# Altium PCB SM1_System-exp.PcbDoc
Units mil, origin at the board's own origin, x right, y up, seen from the top; angles counter-clockwise.
Board outline 6000 x 4000 mil, 2 copper layers (Top Layer, Bottom Layer); 47 components, 45 nets, 224 pads, 0 vias.
Unrouted connection lines stored in the file: 112.
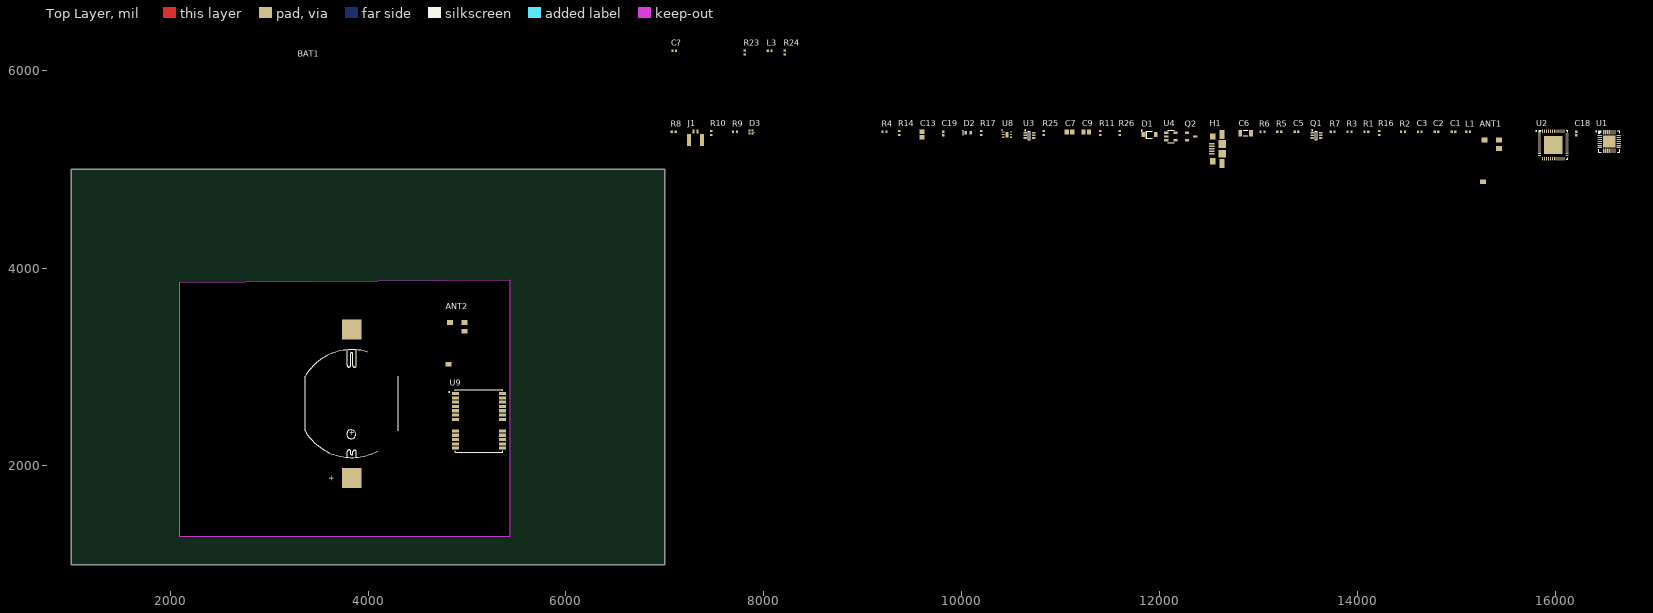
[diagram p0: Top Layer view]
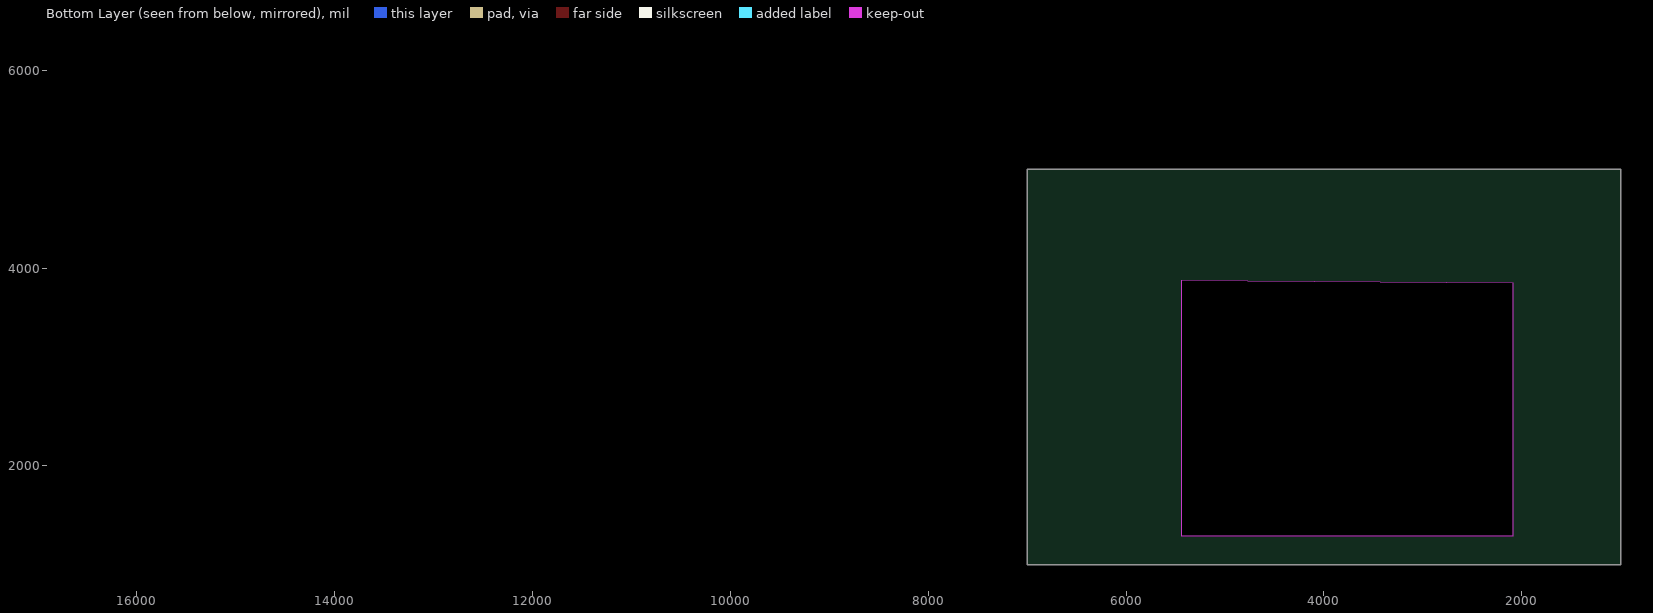
[diagram p1: Bottom Layer view, seen from below]

## Layer stack, top to bottom
Top Solder: solder mask 0.4, Solder Resist, Dk 3.5
Top Layer: signal copper 1.4
Dielectric 1: dielectric 12.6, FR-4, Dk 4.8
Bottom Layer: signal copper 1.4
Bottom Solder: solder mask 0.4, Solder Resist, Dk 3.5

## Board outline
1000,1000 7000,1000 7000,5000 1000,5000
cut-out: 2092.5,3850 2092.5,1290 5437.5,1290 5437.5,1505 5437.5,3875

## Design rules (kind name [scope] priority, off if disabled: settings)
Clearance [All] p1: gap=10 ignorepadtopadclearanceinfootprint=FALSE except(0: Arc-Hole Track-Hole SMDPad-Hole THPad-Hole Via-Hole Fill-Hole Poly-Hole Region-Hole Text-Hole)
PolygonConnect [All] p1: connectstyle=Relief reliefconductorwidth=10 reliefentries=4 polygonreliefangle="90 Angle" airgapwidth=10
RoutingVias [All] p1: holewidth=28 width=50 viastyle="Through Hole" minholewidth=28 minwidth=50 maxholewidth=28 maxwidth=50
SolderMaskExpansion [All] p1: expansion=4 istentingtop=FALSE
Width [All] p1: maxlimit=10 minlimit=10 preferedwidth=10
30 further rules are at their usual default settings.

## Classes and differential pairs
component class SM2_GPS_Module: ANT2 C? D4 L3 R23 R24 U9 U10
component class SM1_System: ANT1 BAT1 C1 C2 C3 C5 C6 C7 C9 C13 C18 C19 D1 D2 D3 H1 J1 L1 Q1 Q2 Q5 Q? R1 R2 R3 R4 R5 R6 R7 R8 R9 R10 R11 R14 R16 R17 R25 R26 U1 U2 U3 U4 U5 U8

## Components (designator, comment, footprint, x,y, rotation, side; value= is the part's Value field where it differs from the comment)
ANT1 "RF ANT 2.4GHZ STAMPED MET SLD" PRO-OB-440 15430,5295 r0 top
ANT2 "RF ANT 2.4GHZ STAMPED MET SLD" PRO-OB-440 4975,3450 r0 top
BAT1 "BATTERY-HOLDER (2450)" BU2450SM-JJ-GTR 3835,2630 r90 top value="Coin Cell Holder"
C1 "" CAPC1005X56N 14970,5380 r0 top
C2 "" CAPC1005X56N 14800,5380 r0 top
C3 "4.7uF" CAPC1005X56N 14630,5380 r0 top
C5 "0.1uF" CAPC1005X56N 13385,5380 r0 top
C6 "100uF" CAPC3216X160L 12870,5365 r0 top
C7 "10uF" CAPC2012X140N 11090,5375 r0 top
C9 "10uF" CAPC2012X140N 11260,5375 r0 top
C13 "10uF" CAPC2012X140N 9600,5350 r90 top
C18 "1uF" CAPC1005X56N 16210,5360 r90 top
C19 "0.1uF" CAPC1005X56N 9815,5360 r90 top
C? "0.1uF" CAPC1005X56N 7095,6195 r0 top
D1 "MBR0520" SOD123 11900,5350 r0 top
D2 "LED_0603" LED1608X55N-RED 10065,5370 r0 top value=Red
D3 "RGB" FC-B1010RGBT-HG 7870,5375 r0 top value="RGB Led"
H1 "Micro USB" 1981584-1 12580,5205 r90 top
J1 "CON2" JST_Micro_2PIN 7310,5380 r0 top
L1 "Inductor" RESC1005X40L 15120,5380 r0 top value=1.8nH
L3 "Inductor" RESC1005X40L 8060,6195 r0 top value=27uH
Q1 "BC847S" SOT65P210X110-6N 13585,5340 r0 top value=2NPN
Q2 "FDN340P" SOT95P240X110-3N 12320,5330 r0 top value="Mosfet P-H"
R1 "10K" RESC1005X40L 14090,5380 r0 top
R2 "22.1K" RESC1005X40L 14460,5380 r0 top
R3 "10K" RESC1005X40L 13920,5380 r0 top
R4 "43K" RESC1005X40L 9220,5380 r0 top
R5 "4.7K" RESC1005X40L 13210,5380 r0 top
R6 "10K" RESC1005X40L 13040,5380 r0 top
R7 "10K" RESC1005X40L 13750,5380 r0 top
R8 "1K" RESC1005X40L 7090,5380 r0 top
R9 "1K" RESC1005X40L 7710,5380 r0 top
R10 "1K" RESC1005X40L 7470,5365 r90 top
R11 "100K" RESC1005X40L 11400,5365 r90 top
R14 "2K" RESC1005X40L 9370,5365 r90 top
R16 "47.5K" RESC1005X40L 14220,5365 r90 top
R17 "100R" RESC1005X40L 10200,5365 r90 top
R23 "22R" RESC1005X40L 7810,6180 r90 top
R24 "1K" RESC1005X40L 8210,6180 r90 top
R25 "2.2K" RESC1005X40L 10830,5365 r90 top
R26 "470" RESC1005X40L 11600,5365 r90 top
U1 "CP2102N" 28-QFN 16545,5280 r0 top
U2 "ESP32-PICO-D4" QFN48 15980,5245 r0 top
U3 "PESD5V0L5UY" SOT65P210X110-6N 10685,5340 r0 top value=ESD
U4 "" SOT95P280X144-5N 12115,5330 r0 top value="LDO 3.3V"
U8 "XB6566H0" "DFN-6 2x2mm" 10460,5350 r0 top value="Battery Protection"
U9 "NEO-6M-GPS" XCVR_NEO-6M-GPS 5121.22,2456.02 r0 top

## Footprints (in the part's own frame and the unit in brackets; to place one, negate y for a bottom-side part, rotate by r counter-clockwise, add the part's x,y. Pads: shape width x height; smd on the part's side, far side on the other; paste and mask are expansions set on the pad)
28-QFN [mm] "QFN, 28-Leads, Body 5.00x5.00mm, Pitch 0.50mm, Thermal Pad 3.15x3.15mm, IPC Medium Density"
  oval 1.15x0.3 smd: 1(-2.4,1.5) 2(-2.4,1) 3(-2.4,0.5) 4(-2.4,0) 5(-2.4,-0.5) 6(-2.4,-1) 7(-2.4,-1.5) 15(2.4,-1.5) 16(2.4,-1) 17(2.4,-0.5) 18(2.4,0) 19(2.4,0.5) 20(2.4,1) 21(2.4,1.5)
  oval 0.3x1.15 smd: 8(-1.5,-2.4) 9(-1,-2.4) 10(-0.5,-2.4) 11(0,-2.4) 12(0.5,-2.4) 13(1,-2.4) 14(1.5,-2.4) 22(1.5,2.4) 23(1,2.4) 24(0.5,2.4) 25(0,2.4) 26(-0.5,2.4) 27(-1,2.4) 28(-1.5,2.4)
  rect 3.15x3.15 smd paste-0.635: 29(0,0)
  silkscreen extent -3.39,-2.73 2.73,2.73, body extent -2.58,-2.57 2.57,2.58, height 1
1981584-1 [mm] "CONN RCPT MICRO USB TYPE AB"
  rect 0.4x1.35 smd: 1(-1.3,1.338) 2(-0.65,1.338) 3(0,1.338) 4(0.65,1.338) 5(1.3,1.338)
  rect 2.3x1.3 smd: 6(-3.75,-1.337) 6(3.75,-1.337)
  rect 1.6x1.4 smd: 6(-3.2,1.113) 6(3.2,1.113)
  rect 2x1.9 smd: 6(-1.25,-1.337) 6(1.25,-1.337)
  body extent -4.4,-4.05 4.4,1.55, height 2.75
BU2450SM-JJ-GTR [mil] "HOLDER,BATT,COIN,24.5MM,SMT"
  rect 200x200 smd: 1(-750,0) 2(750,0)
  silkscreen extent -545,-470 545,470, body extent -842,-475 832,485, height 291
CAPC1005X56N [mm] "Chip Capacitor, 2-Leads, Body 1.0x0.5mm, IPC Medium Density (0402 ceramic)"
  rect 0.62x0.62 smd paste-0.305: 1(-0.45,0) 2(0.45,0)
  body extent -0.55,-0.3 0.55,0.3, height 0.6
CAPC2012X140N [mm] "Chip Capacitor, 2-Leads, Body 2.0x1.3mm, IPC Medium Density (0805 ceramic)"
  rect 1.1x1.3 smd: 1(-0.7,0) 2(0.7,0)
  body extent -1,-0.62 1,0.63, height 1.24
CAPC3216X160L [mm] "Chip Capacitor, 2-Leads, Body 3.2x1.6mm, IPC Least Density(C1206)"
  rect 0.95x1.7 smd: 1(-1.4,0) 2(1.4,0)
  silkscreen extent -0.55,-0.75 0.55,0.75, body extent -1.7,-0.9 1.7,0.9, height 1.9
"DFN-6 2x2mm" [mm] "DFN, 6-Leads, Body 2.00x2.00mm, Pitch 0.65mm, IPC High Density"
  oval 0.6x0.35 smd: 1(-0.975,0.65) 2(-0.975,0) 3(-0.975,-0.65) 4(0.975,-0.65) 5(0.975,0) 6(0.975,0.65)
  rect 0.8x1.4 smd paste-0.15: 7(0,0)
  silkscreen extent -1.37,1.15 -1.27,1.25, body extent -1,-1 1,1, height 0.75
FC-B1010RGBT-HG [mm] "LED,RGB,SMD,RoHS"
  rect 0.45x0.45 smd: 1(0.387,0.388) 2(0.387,-0.387) 3(-0.387,-0.387) 4(-0.387,0.388)
  silkscreen extent 0.76,0 0.91,0, body extent -0.53,-0.55 0.53,0.58, height 0.9
JST_Micro_2PIN [mm]
  rect 0.6x1 smd: 1(0.5,0) 2(-0.5,0)
  rect 1x3 smd: ""(-1.65,-2.175) ""(1.65,-2.175)
  body extent -1.99,-4.74 2,0.24, height 2.9
LED1608X55N-RED [mil] "Chip LED RED, 2-Leads, Body 1.6x0.8mm, IPC Medium Density (0603 med)"
  rect 25x35 smd: 1(-25,0) 2(25,0)
  silkscreen extent -50,-25 -50,25, body extent -31,-16 31,16, height 24
PRO-OB-440 [mm] "RF ANT 2.4GHZ STAMPED MET SLD"
  rect 1.5x1.2 smd paste-0.762 mask+0.2: 1(0,0) 2(0,-2.2)
  rect 1.5x1.2 smd paste-0.762 mask+0.3: 3(-3.7,0) 4(-4.064,-10.709)
  body extent -4.42,-11.14 0.81,2.61, height 3.56
QFN48 [mm] "QFN, 48-Leads, Body 7x7mm, Pitch 0.5mm, IPC Medium Density"
  oval 0.85x0.25 smd: 1(-3.525,2.75) 2(-3.525,2.25) 3(-3.525,1.75) 4(-3.525,1.25) 5(-3.525,0.75) 6(-3.525,0.25) 7(-3.525,-0.25) 8(-3.525,-0.75) 9(-3.525,-1.25) 10(-3.525,-1.75) 11(-3.525,-2.25) 12(-3.525,-2.75) 25(3.525,-2.75) 26(3.525,-2.25) 27(3.525,-1.75) 28(3.525,-1.25) 29(3.525,-0.75) 30(3.525,-0.25) 31(3.525,0.25) 32(3.525,0.75) 33(3.525,1.25) 34(3.525,1.75) 35(3.525,2.25) 36(3.525,2.75)
  oval 0.25x0.85 smd: 13(-2.75,-3.525) 14(-2.25,-3.525) 15(-1.75,-3.525) 16(-1.25,-3.525) 17(-0.75,-3.525) 18(-0.25,-3.525) 19(0.25,-3.525) 20(0.75,-3.525) 21(1.25,-3.525) 22(1.75,-3.525) 23(2.25,-3.525) 24(2.75,-3.525) 37(2.75,3.525) 38(2.25,3.525) 39(1.75,3.525) 40(1.25,3.525) 41(0.75,3.525) 42(0.25,3.525) 43(-0.25,3.525) 44(-0.75,3.525) 45(-1.25,3.525) 46(-1.75,3.525) 47(-2.25,3.525) 48(-2.75,3.525)
  rect 4.7x4.7 smd paste-0.5: 49(0,0)
  silkscreen extent -4.5,-3.72 3.72,3.81, body extent -3.52,-3.51 3.5,3.51, height 0.78
RESC1005X40L [mm] "Chip Resistor, 2-Leads, Body 1.0x0.5mm, IPC Medium Density (0402)"
  rect 0.55x0.65 smd: 1(-0.5,0) 2(0.5,0)
  body extent -0.57,-0.27 0.58,0.28, height 0.41
SOD123 [mil] "Molded Diode, 2-Leads, Body 2.85x1.8mm, IPC Medium Density (SOD123)"
  rect 36x48 smd: 1(-63,0) 2(63,0)
  silkscreen extent -85,-35 25,45, body extent -73,-31 73,31, height 50
SOT65P210X110-6N [mm] "SC70, 6-Leads, Body 2.4x2.2mm (max), Pitch 0.65mm, IPC Medium Density"
  rrect50% 0.9x0.4 smd mask+0.076: 1(-1.1,0.675) 2(-1.1,0.025) 3(-1.1,-0.625) 4(1.1,-0.625) 5(1.1,0.025) 6(1.1,0.675)
  silkscreen extent -1.22,-1.07 0.25,1.42, body extent -1.1,-0.97 1.1,1.01, height 0.99
SOT95P240X110-3N [mm] "SOT23, 3-Leads, Body 3.0x2.5mm (max), Pitch 0.95mm, IPC Medium Density"
  rect 1.15x0.6 smd: 1(-1.075,0.95) 2(-1.075,-0.95) 3(1.075,0)
  body extent -1.2,-1.45 1.2,1.45, height 0.99
SOT95P280X144-5N [mm] "SOT23, 5-Leads, Body 3.1x3.0mm (max), Pitch 0.95mm, IPC Medium Density (RFMD SOT23-5)"
  rect 1.1x0.6 smd: 1(-1.2,0.95) 2(-1.2,0) 3(-1.2,-0.95) 4(1.2,-0.95) 5(1.2,0.95)
  silkscreen extent -0.8,-1.6 0.8,1.6, body extent -1.4,-1.45 1.4,1.45, height 1.45
XCVR_NEO-6M-GPS [mm]
  rect 1.8x0.8 smd paste-2: 1(-6,7) 2(-6,5.9) 3(-6,4.8) 4(-6,3.7) 5(-6,2.6) 6(-6,1.5) 7(-6,0.4) 8(-6,-2.6) 9(-6,-3.7) 10(-6,-4.8) 11(-6,-5.9) 12(-6,-7) 13(6,-7) 14(6,-5.9) 15(6,-4.8) 16(6,-3.7) 17(6,-2.6) 18(6,0.4) 19(6,1.5) 20(6,2.6) 21(6,3.7) 22(6,4.8) 23(6,5.9) 24(6,7)
  silkscreen extent -7.7,-8 6.1,8, body extent -6.1,-8 6.1,8, height 2.6

## Part data
ANT1 ANT2: library part PRO-OB-440, Manufacturer="Proant AB", PartNumber=PRO-OB-440, Vendor=Digi-Key
BAT1: library part BU2450SM-JJ-GTR, "HOLDER,BATT,COIN,24.5MM,SMT", Manufacturer=MPD, PartNumber=BU2450SM-JJ-GTR, Vendor=LCSC
C1 C2: library part CAP_0402, "DNP"
C3: library part CAP_0603, "CAP CER 4.7uF 16V 0402", Manufacturer=Kyocera, PartNumber=CM05X5R475M16AH, Vendor=LCSC
C5 C19 C?: library part CAP_0402, "CAP CER 0.1uF 16V 0402", Manufacturer=CCTC, PartNumber=TCC0402X5R104M160AT, Vendor=LCSC
C6: library part CAP_1206, "CAP CER 100uF 6.3V 1206", Manufacturer="Taiyo Yuden", PartNumber=JMK316BJ107ML-T, Vendor=LCSC
C7 C9: library part CAP_0805, "CAP 10uF 0805", Manufacturer=Murata, PartNumber=GRM21BB31C106KE15L, Vendor=LCSC
C13: library part CAP_0805, "CAP CER 10uF 16V 0805", Manufacturer=Samsung, PartNumber=CL21A106KOQNNNG, Vendor=LCSC
C18: library part CAP_0603, "CAP CER 1uF 16V 0402", Manufacturer=Murata, PartNumber=GRM155R61C105KA12D, Vendor=LCSC
D1: library part MBR0520-TP, "DIODE SCHOTTKY 20V 500MA SOD123", Manufacturer=CJ, PartNumber=MBR0520, Vendor=LCSC
D2: "LED RED CLEAR 0603 SMD", Manufacturer=FNO, PartNumber=FC-DA1608HRK-620D, Vendor=LCSC
D3: library part FC-B1010RGBT-HG, "LED,RGB LED,SMD,RoHS", Manufacturer=Foshan, PartNumber=FC-B1010RGBT-HG, Vendor=LCSC
H1: library part 1981584-1, "CONN RCPT MICRO USB TYPE AB", Manufacturer="REG CON", PartNumber=C21377, Vendor=LCSC
J1: library part JST_Micro_CONN_2PIN, "JST MIcro CONN 2POS"
L1 L3: "Inductor 1.8nH 0402", Manufacturer=GFBE, PartNumber=BKW0603UC1N8KGT, Vendor=LCSC
Q1: "TRANS 2NPN 44V 0.1A SC-70-6", Manufacturer=Changjiang, PartNumber=BC847S, Vendor=LCSC
Q2: "MOSFET P-CH 20V 2A SOT-23", Manufacturer="On Semi", PartNumber=FDN340P, Vendor=LCSC
R1 R3 R6 R7: library part RES_0402, "RES SMD 10K OHM 0402", Manufacturer=Guangdong, PartNumber=RC-02W1002FT, Vendor=LCSC
R2: library part RES_0603, "RES SMD 22.1K OHM 0402", Manufacturer=Yageo, PartNumber=RC0402FR-0722K1L, Vendor=LCSC
R4: library part RES_0603, "RES SMD 43K OHM 0402", Manufacturer=Uniroyal, PartNumber=0402WGF4302TCE, Vendor=LCSC
R5: library part RES_0603, "RES SMD 4.7K OHM 0402", Manufacturer=Yageo, PartNumber=RC0402FR-074K7L, Vendor=LCSC
R8 R9 R10: library part RES_0402, "RES SMD 1K OHM 0402", Manufacturer=Yageo, PartNumber=RC0402FR-071KL, Vendor=LCSC
R11 R23 R24 R25 R26: library part RES_0603, "RES SMD 100K OHM 0402", Manufacturer="Uniroyal Elec", PartNumber=0402WGF1003TCE, Vendor=LCSC
R14: library part RES_0603, "RES SMD 2K OHM 1% 1/10W 0402", Manufacturer="LIZ Elec", PartNumber=CR0402FF2001G, Vendor=LCSC
R16: library part RES_0603, "RES SMD 47.5K OHM 0402", Manufacturer=Yageo, PartNumber=RC0402FR-0747K5L, Vendor=LCSC
R17: library part RES_0603, "RES SMD 100R OHM 1% 1/10W 0402", Manufacturer=Yageo, PartNumber=RC0402FR-07100RL, Vendor=LCSC
U1: "IC BRIDGE USB TO UART 28QFN", Manufacturer="Silicon Labs", PartNumber=CP2102N-A01-GQFN28, Vendor=LCSC
U2: "RF Transceiver ICs QFN-48_7x7x05P RoHS", Manufacturer=Espressif, PartNumber=ESP32-PICO-D4, Vendor=LCSC
U3: "TVS SOT-363 RoHS", Manufacturer=Yenji, PartNumber=PESD5V0L5UY, Vendor=LCSC
U4: library part HT7833, "IC LDO 3.3V 0.5A SOT23-5", Manufacturer=Holtek, PartNumber=HT7833, Vendor=LCSC
U8: "IC Battery Protection", Manufacturer=XySemi, PartNumber=XB6566H0, Vendor=LCSC
U9: "GPS Development Tools SparkFun GNSS-RTK Dead Reckoning Breakout - ZED-F9K (Qwiic)", Package=None, Availability="Not in stock", Check_prices=https://www.snapeda.com/parts/NEO-6M-GPS/u-blox/view-part/?ref=eda, MF=u-blox, MP=NEO-6M-GPS, Price=None, SnapEDA_Link=https://www.snapeda.com/parts/NEO-6M-GPS/u-blox/view-part/?ref=snap

## Nets (pads, with @x,y where several pads share a name; then routed paths per layer and width w, separated by ;. In a path a pad name is that pad's centre, name@x,y a point inside that pad or via, vN(x,y) a via of type N, cw(c..) or ccw(c..) an arc to the next point about the centre after c; other vN are vias at no path point)
+3.3V: C6.1 C9.1 D3.1 R1.1 R7.1 R26.1 U2.1 U2.3 U2.4 U2.19 U2.37 U2.43 U2.46 U4.5
BLUE: R9.2 U2.36
D+: H1.3 U1.4 U3.1
D-: H1.2 U1.5 U3.6
DTR: Q1.1 R6.2 U1.28
EN: C5.1 Q1.3 R1.2 U2.9
GND: ANT1.1 C1.1 C2.1 C3.1 C5.2 C6.2 C7.2 C9.2 C13.2 C18.2 C?.2 H1.5 H1.6 R4.2 R11.2 R16.1 U1.3 U1.29 U2.49 U3.2 U4.2 U8.4 U8.5 U8.6 U9.10 U9.12 U9.13 U9.24
GPS_EN: R25.1 U2.20
GREEN: R10.2 U2.35
IO0: Q1.6 R7.2
NetANT1_2: ANT1.2 C2.2 L1.1
NetANT2_2: ANT2.2 L3.2
NetBAT1_2: BAT1.2 C19.2 J1.2 U8.2 U8.3 U8.7
NetC1_2: C1.2 L1.2 U2.2
NetC3_2: C3.2 R5.1 U1.6
NetC7_1: C7.1 D1.1 Q2.2 U4.1 U4.3
NetC19_1: C19.1 R17.2 U8.1
NetD2_1: D2.1 R14.1
NetD3_2: D3.2 R8.1
NetD3_3: D3.3 R10.1
NetD3_4: D3.4 R9.1
NetD4_2: R24.2
NetL3_1: L3.1 R23.2
NetQ1_2: Q1.2 R3.1
NetQ1_5: Q1.5 R6.1
NetQ5_2: R26.2
NetQ?_2: R25.2
NetR2_1: R2.1 R16.2 U1.8
NetR4_1: R4.1
NetR5_2: R5.2 U1.9
NetR14_2: R14.2
NetR23_1: R23.1 U9.8 U9.9 U9.17
NetR24_1: R24.1 U9.3
RED: R8.2 U2.34
RF_IN: ANT2.1 U9.11
RTS: Q1.4 R3.2 U1.24
RXD: U1.26 U2.40
RXD1_GPS: U2.16 U9.21
SCL: U9.19
SDA: U9.18
TXD: U1.25 U2.41
TXD1_GPS: U2.17 U9.20
VBAT: BAT1.1 C13.1 J1.1 Q2.3 R17.1
VGPS: C?.1 U9.22 U9.23
VUSB: C18.1 D1.2 D2.2 H1.1 Q2.1 R2.2 R11.1 U1.7 U3.5
pads on no net: ANT1.3 ANT1.4 ANT2.3 ANT2.4 H1.4 J1. U1.1 U1.2 U1.10 U1.11 U1.12 U1.13 U1.14 U1.15 U1.16 U1.17 U1.18 U1.19 U1.20 U1.21 U1.22 U1.23 U1.27 U2.5 U2.6 U2.7 U2.8 U2.10 U2.11 U2.12 U2.13 U2.14 U2.15 U2.18 U2.21 U2.22 U2.23 U2.24 U2.25 U2.26 U2.27 U2.28 U2.29 U2.30 U2.31 U2.32 U2.33 U2.38 U2.39 U2.42 U2.44 U2.45 U2.47 U2.48 U3.3 U3.4 U4.4 U9.1 U9.2 U9.4 U9.5 U9.6 U9.7 U9.14 U9.15 U9.16

## Text inside footprints (layer, text, board x,y; h text height)
BAT1: Top Overlay "+" at 3860,2300 h60 r90; Top Overlay "+" at 3656,1843 h60 r90